# EAGLE board Template (EAGLE 5.00)
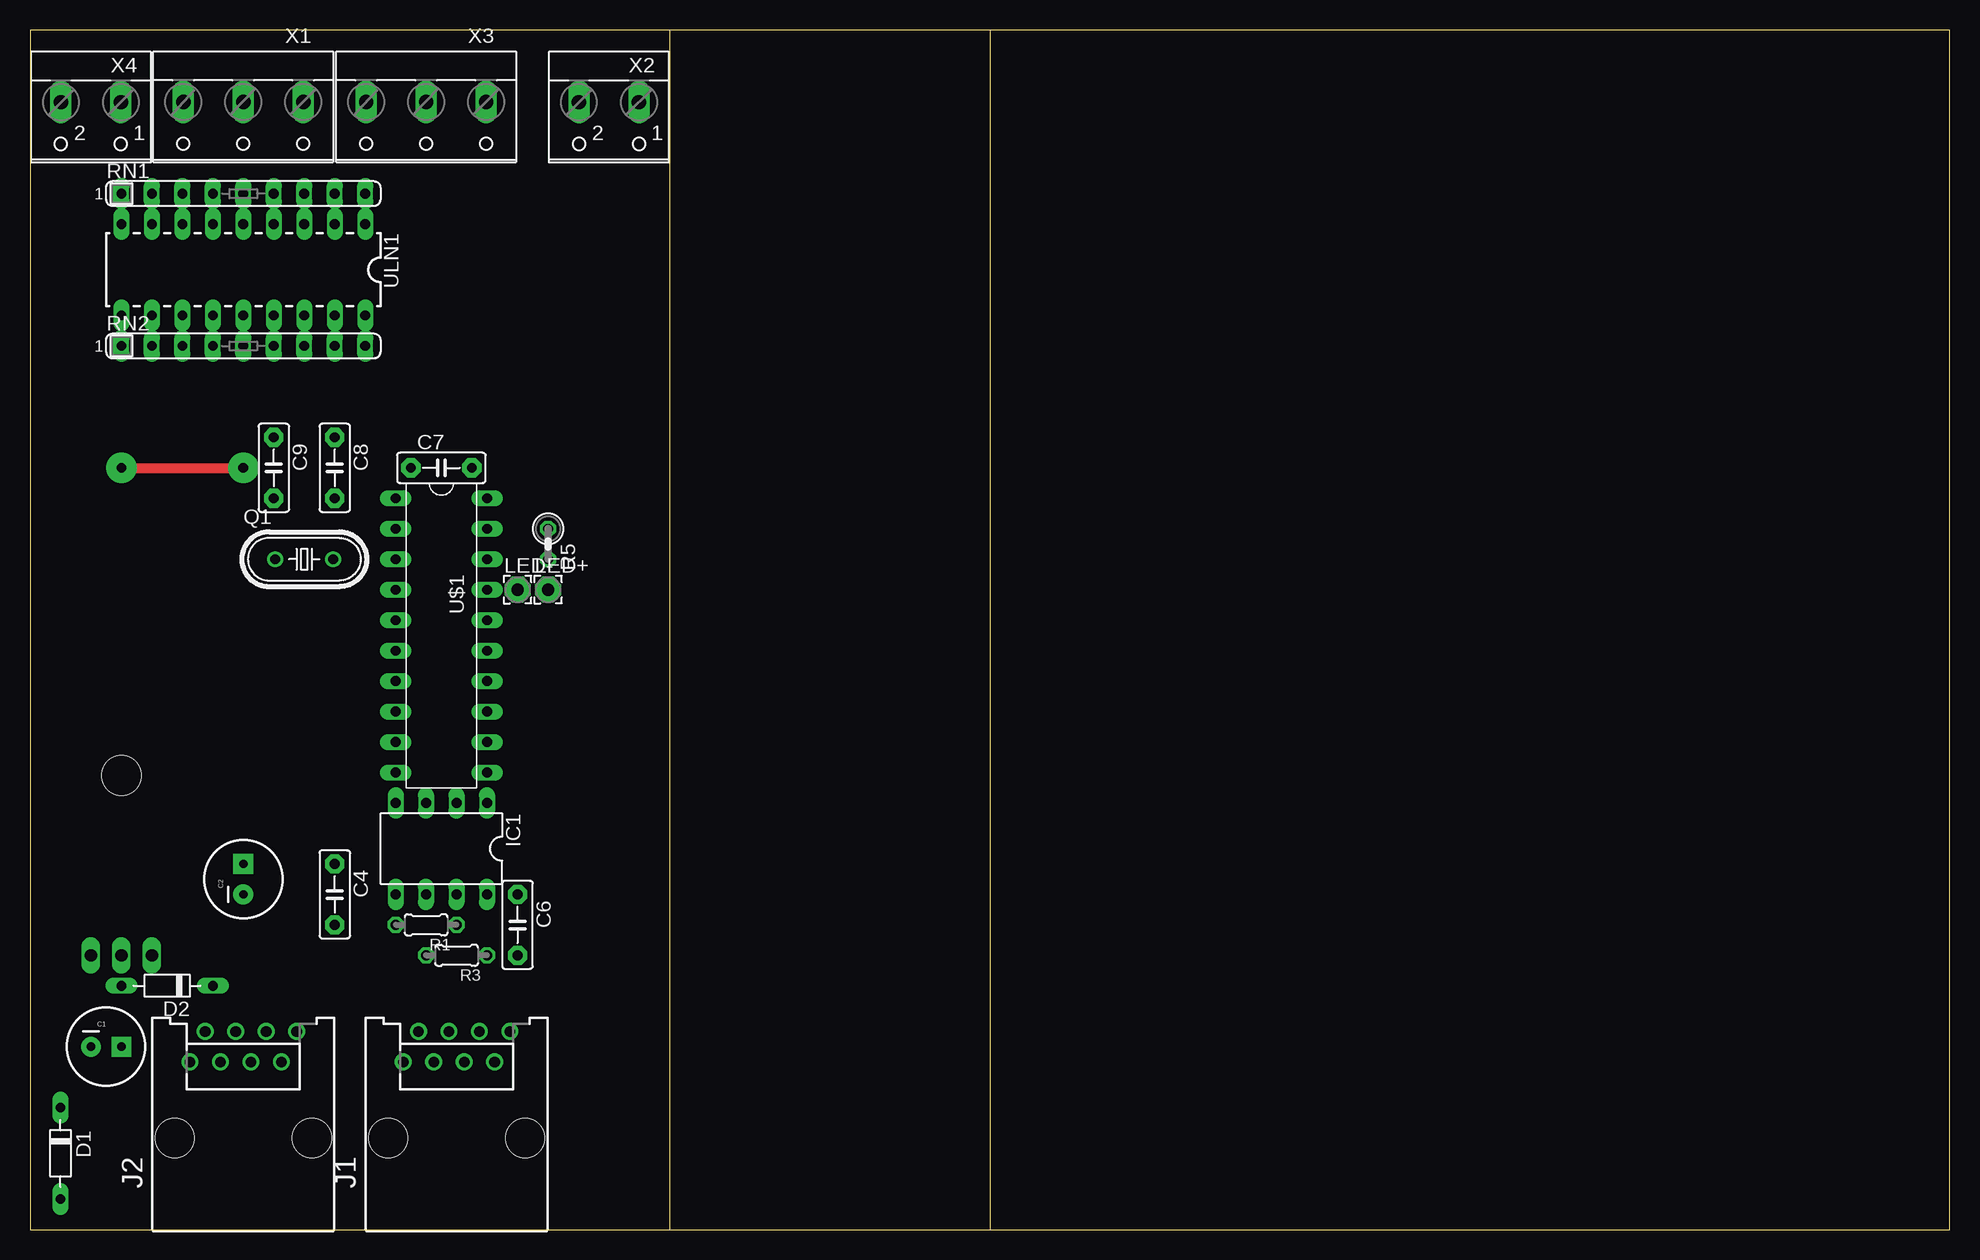
[diagram p0: board, top side]
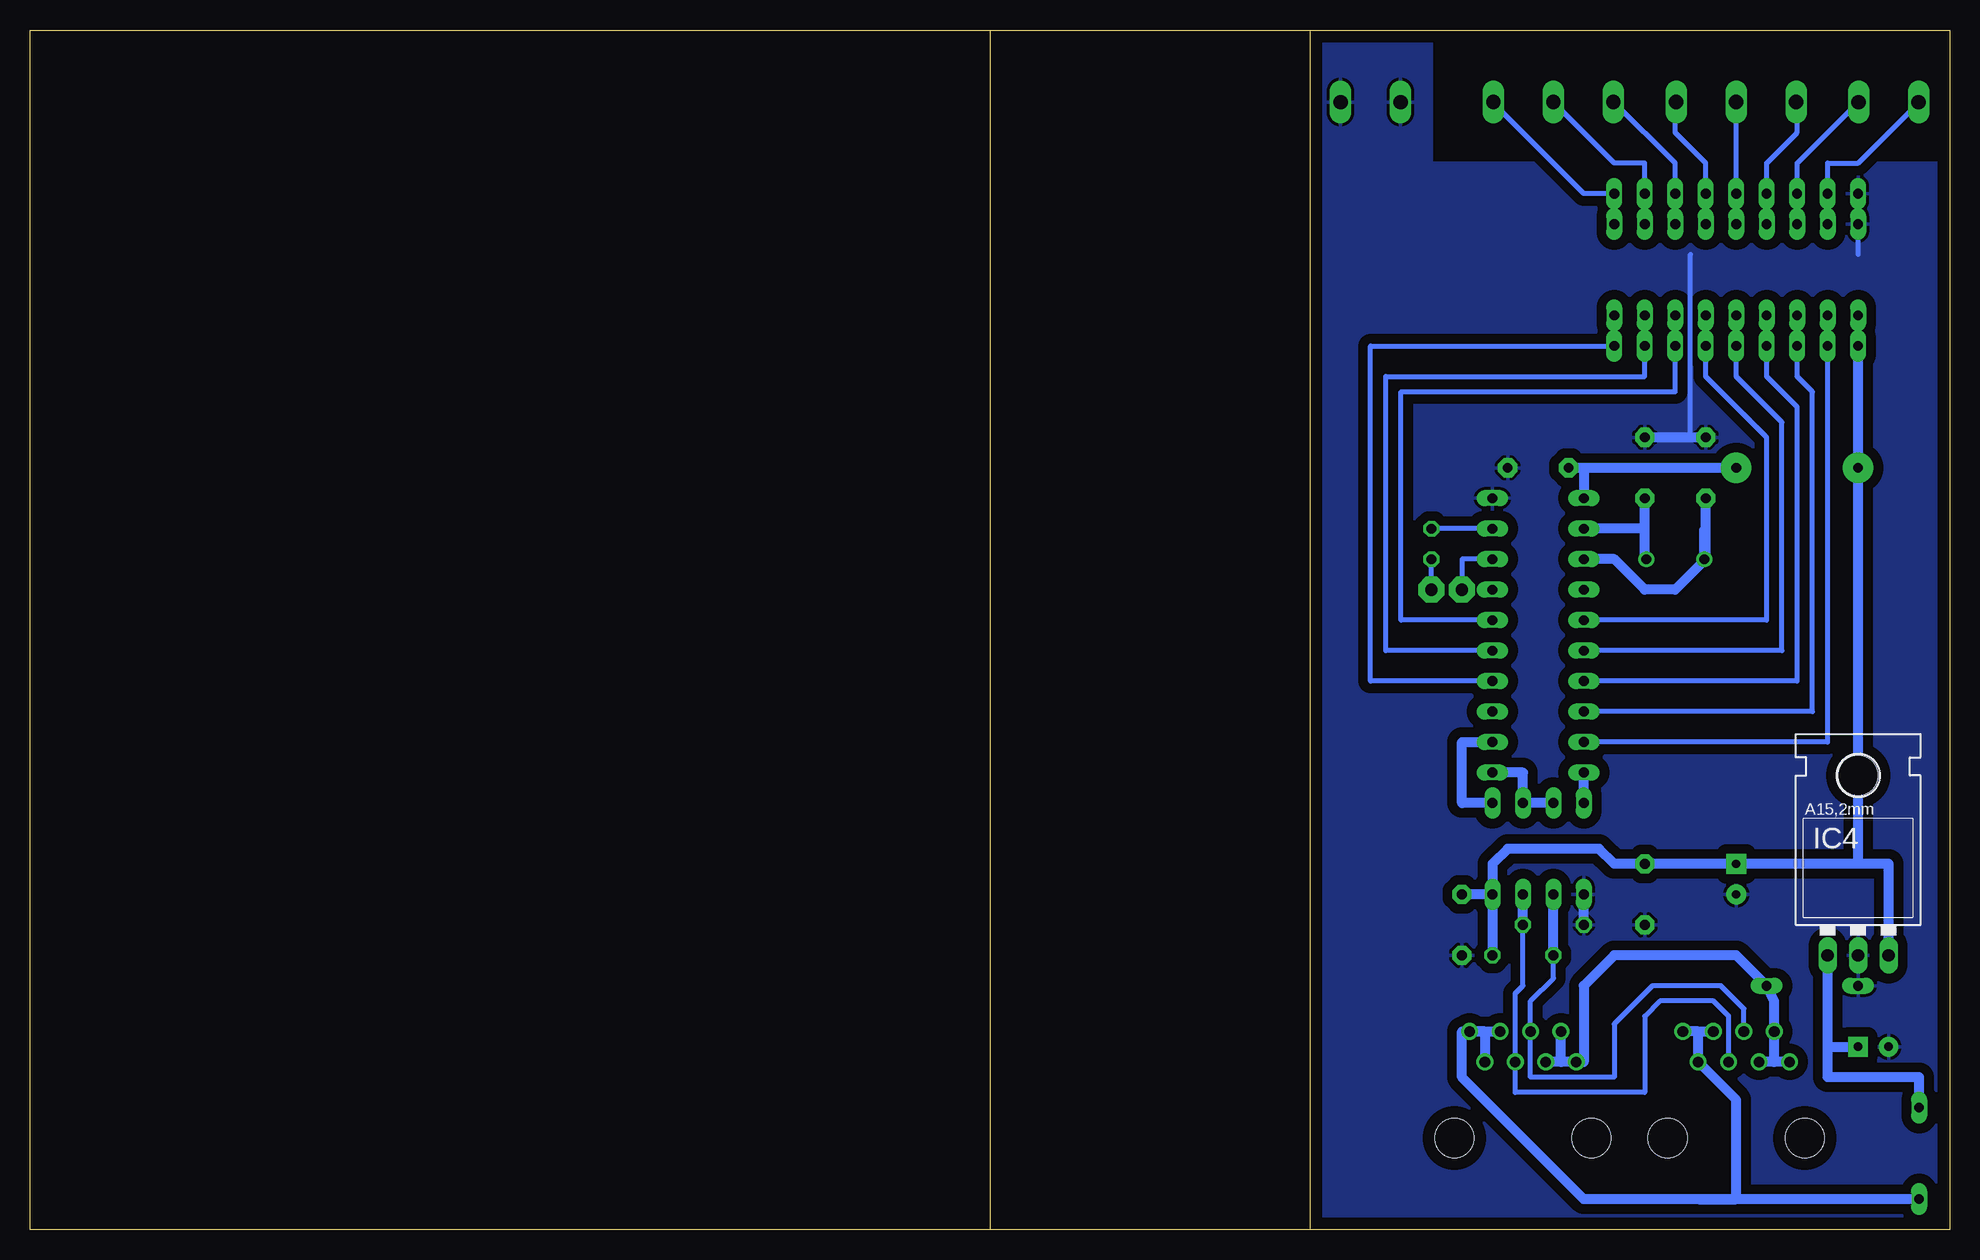
[diagram p1: board, bottom side, seen from below]

Size 160 x 100 mm. Coordinates in mm from the lower left corner, seen from the top.
Outline: 53.31,0 0,0 0,100 53.31,100
Outline: 53.31,0 80,0
Outline: 80,0 160,0 160,100 80,100
Outline: 80,100 53.31,100
Outline: 80,100 80,0
Outline: 53.31,100 53.31,0
Copper layers (1*16): Top 0.035mm / dielectric 1.5mm / Bottom 0.035mm
Design rules "default": minimum track width 10mil, minimum drill 24mil, track to track 8mil, track to pad 8mil, pad to pad 8mil, via to via 8mil, smd to smd 8mil, copper to edge 40mil, drill to drill 8mil, minimum pad ring 10mil, minimum via ring 8mil, stop-mask expansion 4mil, vias tented up to drill 0mil, thermal gap 10mil

## Footprints (pad centres in the part's own frame; a part is rotated, then mirrored left to right if it is on the bottom)
CPOL-RADIAL-100UF-25V = drill 0.7 pad 1.651 square: 1 1.27,0 | drill 0.7 pad 1.651 round: 2 -1.27,0
C5B2.5 = drill 0.813 pad 1.6 octagon: 1 -2.54,0; 2 2.54,0
D-7.5 = drill 0.813 long: A 3.81,0; C -3.81,0
DIL08 = drill 0.813 long: 1 -3.81,-3.81; 2 -1.27,-3.81; 3 1.27,-3.81; 4 3.81,-3.81; 5 3.81,3.81; 6 1.27,3.81; 7 -1.27,3.81; 8 -3.81,3.81
78XXL = drill 1.016 long: GND 0,-3.81; IN -2.54,-3.81; OUT 2.54,-3.81 | hole 3.302: 0,11.176
215877-4 = drill 0.889 round: 1 -4.445,6.35; 2 -3.175,8.89; 3 -1.905,6.35; 4 -0.635,8.89; 5 0.635,6.35; 6 1.905,8.89; 7 3.175,6.35; 8 4.445,8.89 | hole 3.251: -5.715,0; 5.715,0
2,15/1,0 = drill 1.016 pad 2.159 octagon: 1 0,0
HC49U-V = drill 0.813 round: 1 -2.413,0; 2 2.413,0
0204/5 = drill 0.813 octagon: 1 -2.54,0; 2 2.54,0
0207/2V = drill 0.813 octagon: 1 -1.27,0; 2 1.27,0
SIL9 = drill 0.813 long: 1 -10.16,0; 2 -7.62,0; 3 -5.08,0; 4 -2.54,0; 5 0,0; 6 2.54,0; 7 5.08,0; 8 7.62,0; 9 10.16,0
DIL20 = drill 0.813 long: 1 -11.43,-3.81; 2 -8.89,-3.81; 3 -6.35,-3.81; 4 -3.81,-3.81; 5 -1.27,-3.81; 6 1.27,-3.81; 7 3.81,-3.81; 8 6.35,-3.81; 9 8.89,-3.81; 10 11.43,-3.81; 11 11.43,3.81; 12 8.89,3.81; 13 6.35,3.81; 14 3.81,3.81; 15 1.27,3.81; 16 -1.27,3.81; 17 -3.81,3.81; 18 -6.35,3.81; 19 -8.89,3.81; 20 -11.43,3.81
DIL18 = drill 0.813 long: 1 -10.16,-3.81; 2 -7.62,-3.81; 3 -5.08,-3.81; 4 -2.54,-3.81; 5 0,-3.81; 6 2.54,-3.81; 7 5.08,-3.81; 8 7.62,-3.81; 9 10.16,-3.81; 10 10.16,3.81; 11 7.62,3.81; 12 5.08,3.81; 13 2.54,3.81; 14 0,3.81; 15 -2.54,3.81; 16 -5.08,3.81; 17 -7.62,3.81; 18 -10.16,3.81
W237-103 = drill 1.194 long: 1 -5,-1.29; 2 0,-1.29; 3 5,-1.29
W237-102 = drill 1.194 long: 1 -2.5,-1.27; 2 2.5,-1.27

## Placement (x,y rotation side)
C1  100uf ???  [CPOL-RADIAL-100UF-25V]  6.35,15.24 0 top
C2  10uf  [CPOL-RADIAL-100UF-25V]  17.78,29.21 90 top
C4  100nf  [C5B2.5]  25.4,27.94 270 top
C6  10nf  [C5B2.5]  40.64,25.4 270 top
C7  10nf  [C5B2.5]  34.29,63.5 0 top
C8  22pf  [C5B2.5]  25.4,63.5 270 top
C9  22pf  [C5B2.5]  20.32,63.5 270 top
D1  [D-7.5]  2.54,6.35 270 top
D2  [D-7.5]  11.43,20.32 180 top
IC1  LTC485N  [DIL08]  34.29,31.75 180 top
IC4  [78XXL]  7.62,26.67 0 bottom
J1  [215877-4]  35.56,7.62 0 top
J2  [215877-4]  17.78,7.62 0 top
LED+  [2,15/1,0]  43.18,53.34 0 top
LED-  [2,15/1,0]  40.64,53.34 0 top
Q1  low profile 12mhz  [HC49U-V]  22.86,55.88 0 top
R1  10K  [0204/5]  33.02,25.4 180 top
R3  10K  [0204/5]  35.56,22.86 180 top
R5  470  [0207/2V]  43.18,57.15 270 top
RN1  [SIL9]  17.78,86.36 0 top
RN2  [SIL9]  17.78,73.66 0 top
U$1  PIC16F690IP  [DIL20]  34.29,49.53 270 top
ULN1  [DIL18]  17.78,80.01 180 top
X1  [W237-103]  17.78,92.71 180 top
X2  [W237-102]  48.26,92.71 180 top
X3  [W237-103]  33.02,92.71 180 top
X4  [W237-102]  5.08,92.71 180 top

## Library data of the parts
C1 C2 ULN1 = SparkFun
C4 C6-C9 = capacitor-wima
D1 D2 = diode
IC1 = linear-technology
IC4 = v-reg
J1 J2 = con-amp
LED+ LED- = wirepad
Q1 = crystal
R1 R3 = resistor
R5 = rcl
RN1 RN2 = resistor-sil
U$1 = microchip-5
X1-X4 = con-wago-500

## Nets
5V: C2.1 C4.1 C6.1 C7.1 IC1.8 IC4.OUT R3.1 RN2.1 U$1.1 ULN1.10
GND: C1.2 C2.2 C4.2 C6.2 C7.2 C8.1 C9.1 D2.A IC1.5 IC4.GND R1.2 RN1.1 U$1.20 ULN1.9 X2.1 X2.2
N$1: R5.1 U$1.19
N$2: D1.A J1.6 J1.7 J1.8 J2.6 J2.7 J2.8
N$3: IC1.6 J1.4 J2.4 R3.2
N$4: LED+.1 R5.2
N$5: C1.1 D1.C IC4.IN
N$6: RN1.9 ULN1.1 X3.1
N$7: RN1.8 ULN1.2 X3.2
N$8: RN1.7 ULN1.3 X3.3
N$9: D2.C J1.1 J1.2 J1.3 J2.1 J2.2 J2.3
N$10: RN1.6 ULN1.4 X1.1
N$11: RN1.5 ULN1.5 X1.2
N$12: RN1.4 ULN1.6 X1.3
N$13: RN1.3 ULN1.7 X4.1
N$14: RN1.2 ULN1.8 X4.2
N$15: RN2.9 U$1.14 ULN1.18
N$16: RN2.8 U$1.15 ULN1.17
N$17: RN2.7 U$1.16 ULN1.16
N$18: RN2.6 U$1.5 ULN1.15
N$19: RN2.5 U$1.6 ULN1.14
N$20: RN2.4 U$1.7 ULN1.13
N$21: RN2.3 U$1.8 ULN1.12
N$22: RN2.2 U$1.9 ULN1.11
N$23: LED-.1 U$1.18
N$50: IC1.7 J1.5 J2.5 R1.1
N$52: C8.2 Q1.2 U$1.2
N$53: C9.2 Q1.1 U$1.3
UART_DIR: IC1.2 IC1.3 U$1.11
UART_RX: IC1.1 U$1.12
UART_TX: IC1.4 U$1.10

## Tracks (layer width: path | path; a pad name or v marks a point on that pad's centre or on a via)
5V  (via drill 0.81 pad 2.54)
  Top 0.813: v7.62,63.5 v17.78,63.5
  Bottom 0.406: RN2.1 ULN1.10
  Bottom 0.813: IC1.8 R3.1 | IC1.8 C6.1 | IC1.8 38.1,30.48 36.83,31.75 29.21,31.75 27.94,30.48 C4.1 C2.1 5.08,30.48 | 30.48,63.5 C7.1 | 30.48,63.5 U$1.1 | IC4.OUT 5.08,30.48 | 5.08,30.48 7.62,30.48 v7.62,63.5 RN2.1 | v17.78,63.5 30.48,63.5
GND
  Bottom 0.406: 7.62,81.28 ULN1.9 | 21.59,66.04 21.59,81.28
  Bottom 0.813: C9.1 21.59,66.04 C8.1 | R1.2 IC1.5
  pour Bottom (isolate 0.813): 0,88.9 43.18,88.9 43.18,100.33 53.34,100.33 53.34,0 0,0
N$1
  Bottom 0.406: U$1.19 R5.1
N$2
  Bottom 0.813: 38.73,16.51 J1.7 | 38.73,16.51 J1.6 | 38.73,16.51 J1.8 | 38.73,16.51 40.64,16.51 40.64,12.7 30.48,2.54 20.95,2.54 | 20.95,16.51 J2.6 | D1.A 20.95,2.54 | 20.95,16.51 J2.8 | 20.95,2.54 17.78,2.54 17.78,10.79 J2.7 20.95,16.51
N$3
  Bottom 0.406: R3.2 33.02,20.95 34.92,19.05 J1.4 34.92,12.7 27.94,12.7 27.94,17.14 24.77,20.32 19.05,20.32 17.14,18.41 J2.4
  Bottom 0.813: R3.2 IC1.6
N$4
  Bottom 0.406: LED+.1 R5.2
N$5
  Bottom 0.813: 10.16,15.24 IC4.IN | D1.C 2.54,12.7 10.16,12.7 10.16,15.24 | 10.16,15.24 C1.1
N$6
  Bottom 0.406: ULN1.1 RN1.9 30.48,86.36 38.1,93.98 38.08,94 X3.1
N$7
  Bottom 0.406: ULN1.2 RN1.8 25.4,88.9 27.94,88.9 30.48,91.44 X3.2
N$8
  Bottom 0.406: ULN1.3 RN1.7 22.86,88.9 27.96,94 X3.3
N$9
  Bottom 0.813: 14.61,13.97 J2.2 14.61,19.05 D2.C 17.78,22.86 27.94,22.86 30.48,20.32 30.48,13.97 J1.1 32.38,13.97 | J2.1 14.61,13.97 | 14.61,13.97 J2.3 | 32.38,13.97 J1.3 | 32.38,13.97 J1.2
N$10
  Bottom 0.406: ULN1.4 RN1.6 20.32,88.9 22.86,91.44 22.86,93.98 22.84,94 X1.1
N$11
  Bottom 0.406: ULN1.5 RN1.5 X1.2
N$12
  Bottom 0.406: ULN1.6 RN1.4 15.24,88.9 12.7,91.44 12.7,93.98 12.72,94 X1.3
N$13
  Bottom 0.406: ULN1.7 RN1.3 12.7,88.9 7.62,93.98 X4.1
N$14
  Bottom 0.406: ULN1.8 RN1.2 10.16,88.9 7.62,88.9 2.54,93.98 X4.2
N$15
  Bottom 0.406: U$1.14 48.26,45.72 48.26,73.66 RN2.9 ULN1.18
N$16
  Bottom 0.406: U$1.15 46.99,48.26 46.99,71.12 25.4,71.12 RN2.8 ULN1.17
N$17
  Bottom 0.406: U$1.16 45.72,50.8 45.72,69.85 22.86,69.85 RN2.7 ULN1.16
N$18
  Bottom 0.406: U$1.5 15.24,50.8 15.24,66.04 20.32,71.12 RN2.6 ULN1.15
N$19
  Bottom 0.406: U$1.6 13.97,48.26 13.97,67.31 17.78,71.12 RN2.5 ULN1.14
N$20
  Bottom 0.406: U$1.7 12.7,45.72 12.7,68.58 15.24,71.12 RN2.4 ULN1.13
N$21
  Bottom 0.406: U$1.8 11.43,43.18 11.43,69.85 12.7,71.12 RN2.3 ULN1.12
N$22
  Bottom 0.406: U$1.9 10.16,40.64 RN2.2 ULN1.11
N$23
  Bottom 0.406: U$1.18 40.64,55.88 LED-.1
N$50
  Bottom 0.406: R1.1 35.56,20.32 36.2,19.68 J1.5 36.2,11.43 25.4,11.43 25.4,17.78 24.13,19.05 19.68,19.05 18.41,17.78 J2.5
  Bottom 0.813: R1.1 IC1.7
N$52
  Bottom 0.813: 25.4,55.88 25.4,58.42 U$1.2 | Q1.2 25.4,55.88 | 25.4,55.88 C8.2
N$53
  Bottom 0.813: 20.32,55.88 Q1.1 20.45,58.29 20.32,55.88 | 20.32,55.88 22.86,53.34 25.4,53.34 27.94,55.88 U$1.3 | 20.32,55.88 C9.2
UART_DIR
  Bottom 0.813: U$1.11 35.56,38.1 IC1.2 IC1.3
UART_RX
  Bottom 0.813: U$1.12 40.64,40.64 40.64,35.56 IC1.1
UART_TX
  Bottom 0.813: IC1.4 U$1.10